# Altium PCB PCB1.PcbDoc
Units mil, origin at the board's own origin, x right, y up, seen from the top; angles counter-clockwise.
Board outline 5118.11 x 8661.42 mil, 2 copper layers (Top Layer, Bottom Layer); 13 components, 32 nets, 104 pads, 10 vias.
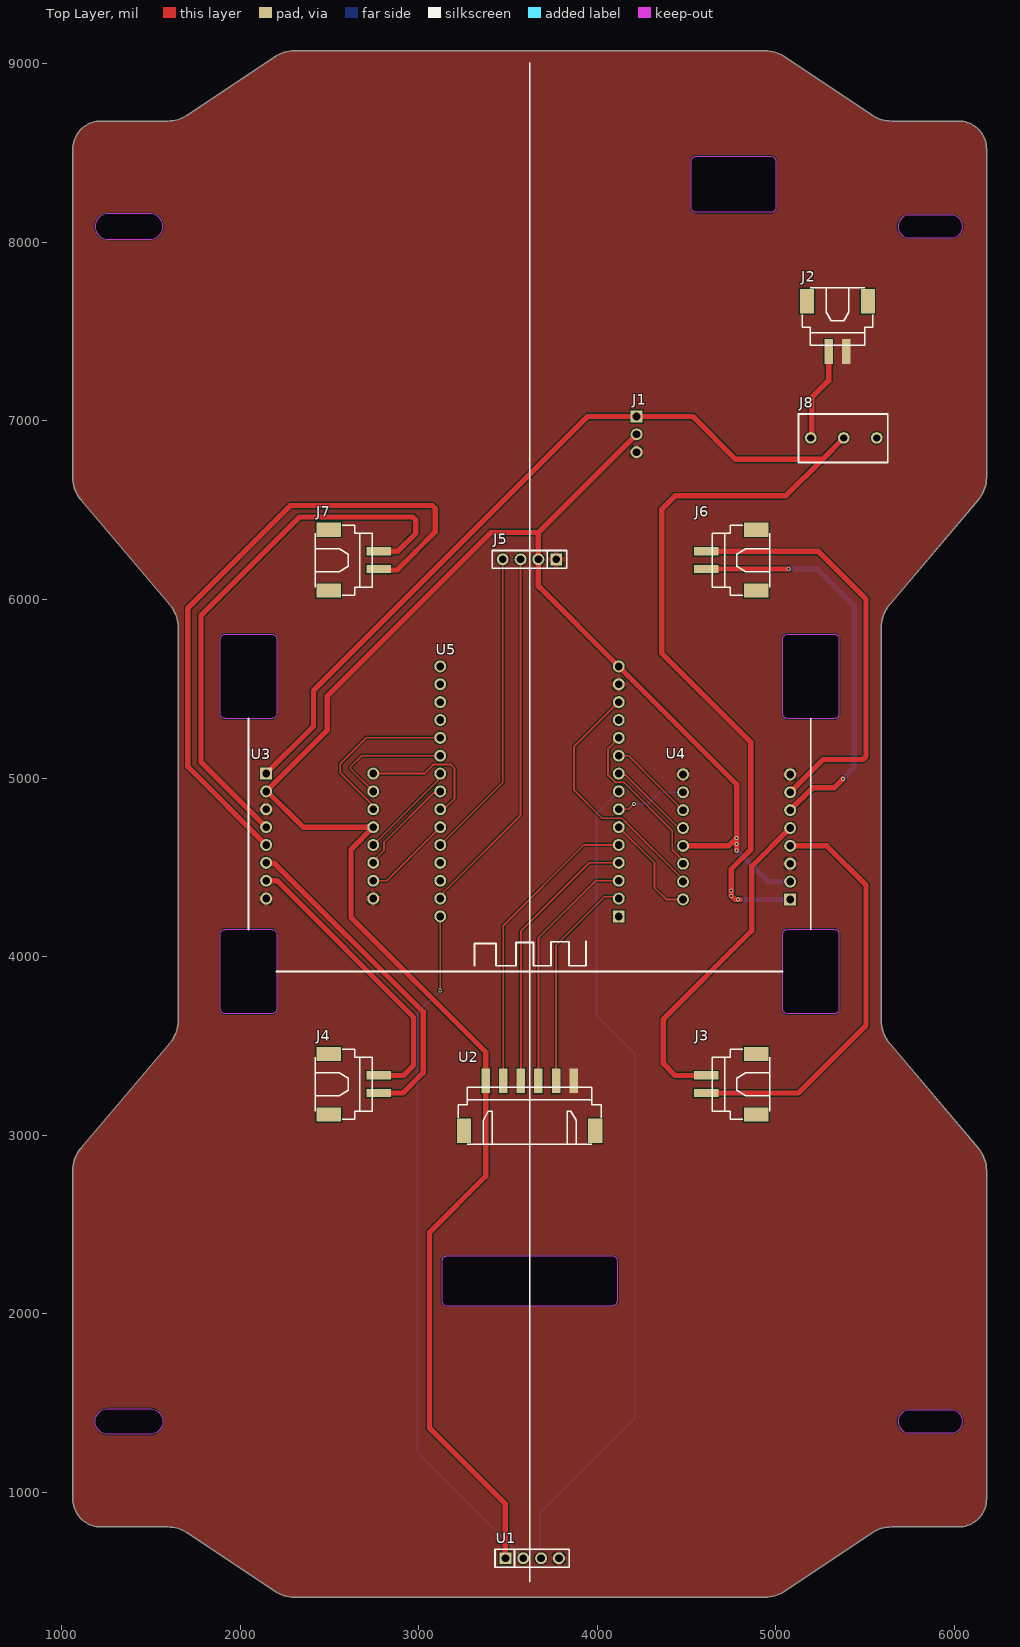
[diagram p0: Top Layer view]
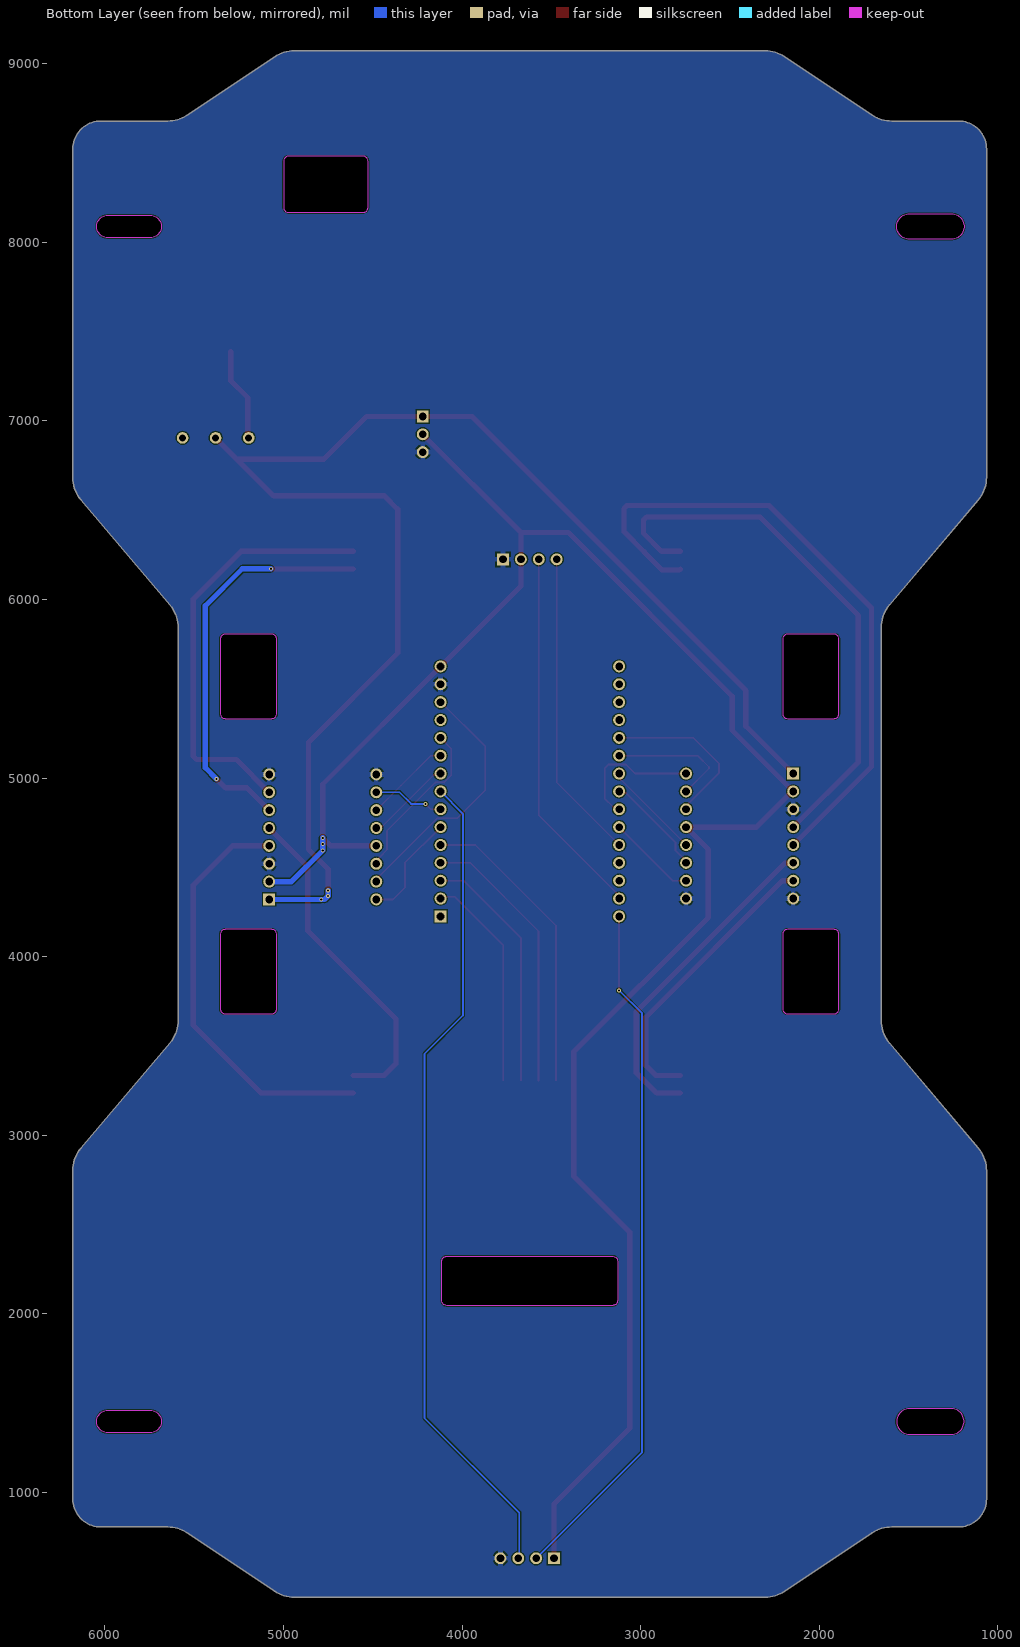
[diagram p1: Bottom Layer view, seen from below]
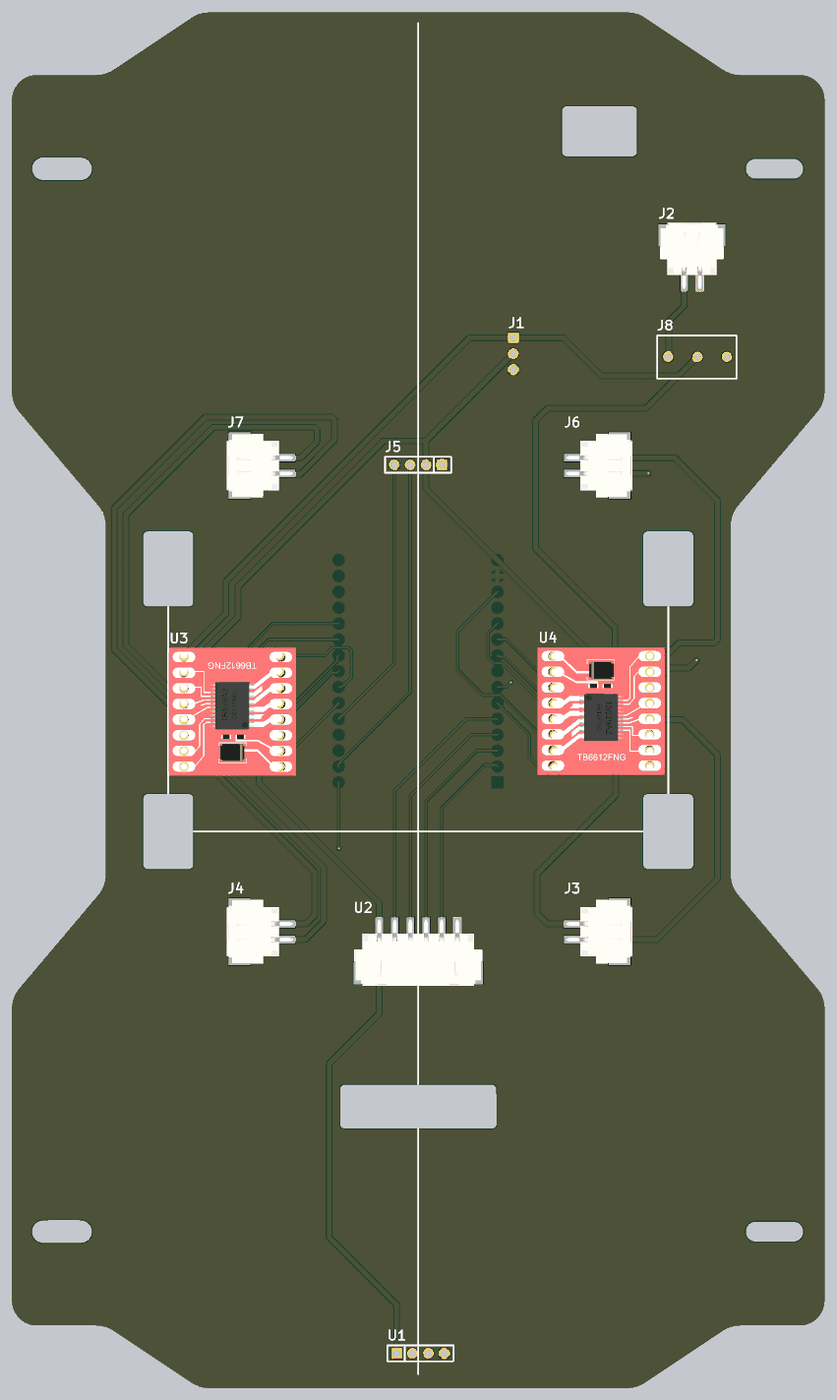
[diagram p2: 3D render of the assembled board from above, using the file's embedded part models]

## Layer stack, top to bottom
Top Solder: solder mask 0.4, Solder Resist, Dk 3.5
Top Layer: signal copper 1.4
Dielectric 1: dielectric 12.6, FR-4, Dk 4.8
Bottom Layer: signal copper 1.4
Bottom Solder: solder mask 0.4, Solder Resist, Dk 3.5

## Board outline
1062.01,962.95 ccw(c1219.49,962.95) 1219.49,805.47 1592.96,805.47 cw(c1592.96,608.62) 1702.15,772.41 2193.52,444.83 ccw(c2302.71,608.62) 2302.71,411.77 4939.42,411.77 ccw(c4939.42,608.62) 5048.61,444.83 5539.98,772.41 cw(c5649.17,608.62) 5649.17,805.47 6022.64,805.47 ccw(c6022.64,962.95) 6180.12,962.95 6180.12,2800.33 ccw(c5983.27,2800.33) 6133.59,2927.43 5636.1,3515.81 cw(c5786.42,3642.91) 5589.57,3642.91 5589.57,5842.04 cw(c5786.42,5842.04) 5636.1,5969.14 6133.59,6557.52 ccw(c5983.27,6684.62) 6180.12,6684.62 6180.12,8522 ccw(c6022.64,8522) 6022.64,8679.48 5649.17,8679.48 cw(c5649.17,8876.34) 5539.98,8712.55 5048.61,9040.12 ccw(c4939.42,8876.34) 4939.42,9073.19 2302.71,9073.19 ccw(c2302.71,8876.34) 2193.52,9040.12 1702.15,8712.55 cw(c1592.96,8876.34) 1592.96,8679.48 1219.49,8679.48 ccw(c1219.49,8522) 1062.01,8522 1062.01,6684.62 ccw(c1258.86,6684.62) 1108.54,6557.52 1606.03,5969.14 cw(c1455.71,5842.04) 1652.56,5842.04 1652.56,3642.91 cw(c1455.71,3642.91) 1606.03,3515.81 1108.54,2927.43 ccw(c1258.86,2800.33) 1062.01,2800.33
cut-out: 5747.05,8025.94 5983.27,8025.94 ccw(c5983.27,8088.93) 5983.27,8151.93 5747.05,8151.93 ccw(c5747.05,8088.93)
cut-out: 5038.39,5360.59 5038.39,5777.91 cw(c5065.95,5777.91) 5065.95,5805.47 5325.79,5805.47 cw(c5325.79,5777.91) 5353.35,5777.91 5353.35,5360.59 cw(c5325.79,5360.59) 5325.79,5333.03 5065.95,5333.03 cw(c5065.95,5360.59)
cut-out: 5038.39,3707.04 5038.39,4124.37 cw(c5065.95,4124.37) 5065.95,4151.93 5325.79,4151.93 cw(c5325.79,4124.37) 5353.35,4124.37 5353.35,3707.04 cw(c5325.79,3707.04) 5325.79,3679.48 5065.95,3679.48 cw(c5065.95,3707.04)
cut-out: 5747.05,1333.03 5983.27,1333.03 ccw(c5983.27,1396.02) 5983.27,1459.01 5747.05,1459.01 ccw(c5747.05,1396.02)
cut-out: 1258.86,1325.15 cw(c1258.86,1396.02) 1258.86,1466.89 1495.08,1466.89 cw(c1495.08,1396.02) 1495.08,1325.15
cut-out: 3128.94,2073.19 ccw(c3156.5,2073.19) 3156.5,2045.63 4085.63,2045.63 ccw(c4085.63,2073.19) 4113.19,2073.19 4113.19,2293.66 ccw(c4085.63,2293.66) 4085.63,2321.22 3156.5,2321.22 ccw(c3156.5,2293.66) 3128.94,2293.66
cut-out: 1888.78,3707.04 1888.78,4124.37 cw(c1916.34,4124.37) 1916.34,4151.93 2176.18,4151.93 cw(c2176.18,4124.37) 2203.74,4124.37 2203.74,3707.04 cw(c2176.18,3707.04) 2176.18,3679.48 1916.34,3679.48 cw(c1916.34,3707.04)
cut-out: 1888.78,5360.59 1888.78,5777.91 cw(c1916.34,5777.91) 1916.34,5805.47 2176.18,5805.47 cw(c2176.18,5777.91) 2203.74,5777.91 2203.74,5360.59 cw(c2176.18,5360.59) 2176.18,5333.03 1916.34,5333.03 cw(c1916.34,5360.59)
cut-out: 1258.86,8018.07 1495.08,8018.07 ccw(c1495.08,8088.93) 1495.08,8159.8 1258.86,8159.8 ccw(c1258.86,8088.93)
cut-out: 4526.58,8195.23 4526.58,8455.08 cw(c4554.14,8455.08) 4554.14,8482.63 4971.46,8482.63 cw(c4971.46,8455.08) 4999.02,8455.08 4999.02,8195.23 cw(c4971.46,8195.23) 4971.46,8167.67 4554.14,8167.67 cw(c4554.14,8195.23)

## Design rules (kind name [scope] priority, off if disabled: settings)
Clearance [All] p1: gap=6 ignorepadtopadclearanceinfootprint=FALSE
PolygonConnect [All] p1: thpad.connectstyle=Relief thpad.reliefconductorwidth=30 thpad.reliefentries=4 thpad.polygonreliefangle="90 Angle" thpad.airgapwidth=10 smdpad.connectstyle=Direct smdpad.reliefconductorwidth=30 smdpad.reliefentries=4 smdpad.polygonreliefangle="90 Angle" smdpad.airgapwidth=5 via.connectstyle=Direct via.reliefconductorwidth=10 via.reliefentries=4 via.polygonreliefangle="90 Angle" via.airgapwidth=10
RoutingVias [All] p1: holewidth=12 width=22 viastyle="Through Hole" minholewidth=12 minwidth=22 maxholewidth=12 maxwidth=22
SolderMaskExpansion [All] p1: expansion=4 istentingtop=FALSE
Width PWR [InNetClass('PWR')] p1: maxlimit=90 minlimit=30 preferedwidth=30
Width [All] p2: maxlimit=10 minlimit=10 preferedwidth=10
30 further rules are at their usual default settings.

## Classes and differential pairs
net class PWR: +12 GND M1A M1B M2A M2B M3A M3B M4A M4B POWER VCC

## Components (designator, comment, footprint, x,y, rotation, side; value= is the part's Value field where it differs from the comment)
J1 "稳压模块" SIP3 4220,7025 r270 top
J2 "Power12V" XH2.54-WS-2P 5345,7585 r180 top
J3 "MOTOR1" XH2.54-WS-2P 4805,3285 r90 top
J4 "MOTOR2" XH2.54-WS-2P 2580,3285 r270 top
J5 "OLED" SIP_4P-P2.54-V-F 3620,6225 r180 top
J6 "MOTOR3" XH2.54-WS-2P 4805,6220 r90 top
J7 "MOTOR4" XH2.54-WS-2P 2580,6220 r270 top
J8 "SIP3" SS-12D10 5191.96,6967 r0 top
U1 "HC-SR04" SIP_4P-P2.54-V-F 3635,630 r0 top
U2 "FollowLine" XH2.54-WS-6P 3621.06,3108.62 r0 top
U3 "TB6612FNG" TB6612FNG 1974,5253 r270 top
U4 "TB6612FNG" TB6612FNG 5251,4092 r90 top
U5 "esp32" ESP32 -16360,10189 r180 top

## Footprints (in the part's own frame and the unit in brackets; to place one, negate y for a bottom-side part, rotate by r counter-clockwise, add the part's x,y. Pads: shape width x height; smd on the part's side, far side on the other; paste and mask are expansions set on the pad)
ESP32 [mil]
  rect 66.93x66.93 hole 43.31 mask+2: 1(-20480,5964)
  round 66.93 hole 43.31 mask+2: 2(-20480,5864) 3(-20480,5764) 4(-20480,5664) 5(-20480,5564) 6(-20480,5464) 7(-20480,5364) 8(-20480,5264) 9(-20480,5164) 10(-20480,5064) 11(-20480,4964) 12(-20480,4864) 13(-20480,4764) 14(-20480,4664) 15(-20480,4564) 16(-19480,5964) 17(-19480,5864) 18(-19480,5764) 19(-19480,5664) 20(-19480,5564) 21(-19480,5464) 22(-19480,5364) 23(-19480,5264) 24(-19480,5164) 25(-19480,5064) 26(-19480,4964) 27(-19480,4864) 28(-19480,4764) 29(-19480,4664) 30(-19480,4564)
  silkscreen extent -20297,6105 -19671,6241
SIP3 [mm]
  rect 1.7x1.7 hole 1.1 mask+0.051: 1(0,0)
  round 1.7 hole 1.1 mask+0.051: 2(2.54,0) 3(5.08,0)
SIP_4P-P2.54-V-F [mm]
  rect 1.7x1.7 hole 1.1 mask+0.051: 1(-3.81,0)
  round 1.7 hole 1.1 mask+0.051: 2(-1.27,0) 3(1.27,0) 4(3.81,0)
  silkscreen extent -5.29,-1.27 5.29,1.27
SS-12D10 [mil] "3脚两档开关"
  round 65 hole 40: 1(3,-62) 2(188.04,-62) 3(373.08,-62)
  silkscreen extent -66,-200 434,72
TB6612FNG [mil]
  rect 66.93x66.93 hole 43.31 mask+2: 1(228,171)
  round 66.93 hole 43.31 mask+2: 2(328,171) 3(428,171) 4(528,171) 5(628,171) 6(728,171) 7(828,171) 8(928,171) 9(228,771) 10(328,771) 11(428,771) 12(528,771) 13(628,771) 14(728,771) 15(828,771) 16(928,771)
  body extent 179,75 986,878, height 146
XH2.54-WS-2P [mm] "长：10mm，宽：8mm，高：6.1mm"
  rect 2x3.5 smd: 0(-4.327,-2.15) 0(4.327,-2.15)
  rect 1.2x3.5 smd: 1(-1.25,4.981) 2(1.25,4.981)
  silkscreen extent -5,-4.06 5,4.06, body extent -5,-4 5,6.42, height 6.05
XH2.54-WS-6P [mm] "长：20mm，宽：8mm，高：6.1mm"
  rect 2x3.5 smd: 0(-9.327,-2.15) 0(9.327,-2.15)
  rect 1.2x3.5 smd: 1(-6.25,4.981) 2(-3.75,4.981) 3(-1.25,4.981) 4(1.25,4.981) 5(3.75,4.981) 6(6.25,4.981)
  silkscreen extent -10.16,-4.06 10.16,4.06, body extent -10,-4 10,6.42, height 6.05

## Part data
J1: library part SIP3, "jointbar"
J2 J3 J4 J6 J7: library part SIP2, "jointbar"
J5: library part SIP4, "jointbar"
J8: "jointbar"
U5: library part ESP32NodeMcu-32S

## Via types
v1: diameter 22, hole 12, Top Layer to Bottom Layer, tented both sides, 10 vias

## Nets (pads, with @x,y where several pads share a name; then routed paths per layer and width w, separated by ;. In a path a pad name is that pad's centre, name@x,y a point inside that pad or via, vN(x,y) a via of type N, cw(c..) or ccw(c..) an arc to the next point about the centre after c; other vN are vias at no path point)
+12: J1.1 J8.2 U3.1 U4.1 | length 8190
  Top Layer w30: U3.1 2410,5290 2410,5490 3945,7025 J1.1 4535,7025 4775,6785 5260,6785 ; 4800,4320 4770,4320 v1(4750,4340) v1(4750,4370) 4750,4490 4860,4600 4860,5200 4360,5700 4360,6505 4435,6580 5055,6580 5260,6785 ; J8.2 5260,6785
  Bottom Layer w30: v1(4750,4370) v1(4750,4340) 4770.12,4319.88 v1(4788.24,4319.88) 4788.36,4320 U4.1
Echo: U1.3 U5.8 | length 4657.4
  Bottom Layer w10: U1.3 3680,635 3680,885 4210,1415 4210,3455 3995,3670 3995,4800 U5.8
GND: J1.3 J2.1 J5.1 U1.4 U2.6 U3.3 U3.8 U3.16 U4.3 U4.8 U4.16 U5.14
M1A: J3.1 U4.4 | length 2354.3
  Top Layer w30: J3.1 5125.79,3235.79 5505,3615 5505,4400 5285,4620 U4.4
M1B: J3.2 U4.5 | length 1880.2
  Top Layer w30: J3.2 4435.79,3334.21 4370,3400 4370,3650 4865,4145 4865,4505 U4.5
M1IN1: U4.11 U5.11 | length 933.3
  Top Layer w10: U5.11 4060,5165 4060,5015 4096.91,4978.09 4100.44,4974.56 cw(c4125.45,4816.94) 4150.44,4974.56 4152.78,4972.22 4420,4705 4420,4597.73 4464.6,4553.14 4464.6,4550.81 4480,4535.4 U4.11
M1IN2: U4.10 U5.13 | length 1428
  Top Layer w10: U5.13 4117.93,5425 3870,5177.07 3870,4931.24 4026.1,4775.14 4138,4775.14 4160,4753.14 4480,4433.14 U4.10
M1PWM: U4.9 U5.6 | length 609.8
  Top Layer w10: U5.6 4320,4525 4320,4385 4385,4320 U4.9
M2A: J4.1 U3.7 | length 1628.9
  Top Layer w30: U3.7 2205,4425 2970,3660 2970,3390 2914.21,3334.21 J4.1
M2B: J4.2 U3.6 | length 1862.1
  Top Layer w30: U3.6 2147.98,4522.02 2192.98,4522.02 3025,3690 3025,3350 2910.79,3235.79 J4.2
M2IN1: U3.11 U5.26 | length 951.7
  Top Layer w10: U3.11 2745,4840.4 2730.73,4854.67 2730.73,4859.27 2560,5030 2560,5080 2705,5225 U5.26
M2IN2: U3.10 U5.25 | length 719.4
  Top Layer w10: U3.10 2616.64,5053.36 2616.64,5061.64 2680,5125 U5.25
M2PWM: U3.9 U5.22 | length 758.8
  Top Layer w10: U3.9 3030,5025 3080,5075 3180,5075 3200,5055 3200,4885 3154.27,4839.27 3149.67,4839.27 3135.4,4825 U5.22
M3A: J6.2 U4.7 | length 2395.9
  Top Layer w30: J6.2 5237.85,6269.21 5505,6002.06 5505,5121.3 5487.43,5103.72 5263.72,5103.72 U4.7
M3B: J6.1 U4.6 | length 2278.9
  Top Layer w30: J6.1 5069.49,6170.79 v1(5070.6,6171.9) ; U4.6 5205,4945 5325,4945 v1(5375,4995)
  Bottom Layer w30: v1(5070.6,6171.9) 5230.83,6171.9 5438.25,5964.47 5438.25,5058.25 v1(5375,4995)
M3IN1: U4.14 U5.10 | length 486.3
  Top Layer w10: U5.10 4175,5125 4342,4958 U4.14
M3IN2: U4.13 U5.9 | length 486.3
  Top Layer w10: U5.9 4128.69,5016.31 4159.85,5016.31 4456.16,4720 U4.13
M3PWM: U4.15 U5.7 | length 399.4
  Top Layer w10: U5.7 4175,4825 v1(4205,4855)
  Bottom Layer w10: v1(4205,4855) 4285,4855 4350,4920 U4.15
M4A: J7.1 U3.4 | length 3098
  Top Layer w30: U3.4 1780,5090 1780,5910 2331.79,6461.79 2965.71,6461.79 2983.28,6444.22 2983.28,6370.82 2881.67,6269.21 J7.1
M4B: J7.2 U3.5 | length 3676.8
  Top Layer w30: U3.5 1706.85,5063.15 1706.85,5951.85 2281.01,6526.01 3075.41,6526.01 3092.98,6508.43 3092.98,6380.18 2980,6267.2 2980,6266.2 2878.8,6165 2781.89,6165 J7.2
M4IN1: U3.14 U5.23 | length 572.9
  Top Layer w10: U3.14 2745,4535 2805,4595 2805,4640 3080.73,4915.73 3110.73,4915.73 U5.23
M4IN2: U3.13 U5.24 | length 555.3
  Top Layer w10: U3.13 3109.11,4989.11 3109.11,5014.11 U5.24
M4PWM: U3.15 U5.21 | length 499.3
  Top Layer w10: U3.15 2820,4425 U5.21
POWER: J2.2 J8.1 | length 525.7
  Top Layer w30: J8.1 5200,6910.04 5200,7130 5295.79,7225.79 J2.2
SCL: J5.3 U5.17 | length 2086.4
  Top Layer w10: U5.17 3120,4340.4 3135.86,4356.26 3135.86,4357.68 3570,4791.83 J5.3
SDA: J5.4 U5.20 | length 1745
  Top Layer w10: U5.20 3470,4975 J5.4
Trig: U1.2 U5.16 | length 3894
  Top Layer w10: v1(3120,3810) U5.16
  Bottom Layer w10: v1(3120,3810) 2991.56,3681.56 2991.56,1223.44 U1.2
VCC: J1.2 J5.2 U1.1 U2.1 U3.2 U3.12 U4.2 U4.12 U5.15 | length 11465.3
  Top Layer w30: U1.1 3485,935 3060,1360 3060,2455 3375,2770 U2.1 3375,3465 2620,4220 2620,4600 U3.12 2351.43,4725 2151.43,4925 U3.2 2486.34,5266.34 2486.34,5457.79 3403.55,6375 3670,6375 ; J1.2 3670,6375 ; U4.12 4735,4620 v1(4780,4665) ; v1(4780,4595) v1(4780,4630) v1(4780,4665) ; 3670,6375 J5.2 3670,6075 U5.15 4780,4965 v1(4780,4665)
  Bottom Layer w30: v1(4780,4665) v1(4780,4630) v1(4780,4595) 4955,4420 U4.2
X1: U2.2 U5.5 | length 1702.3
  Top Layer w10: U2.2 3473.43,4173.43 3925,4625 U5.5
X2: U2.3 U5.4 | length 1544
  Top Layer w10: U2.3 3571.85,4141.85 3955,4525 U5.4
X3: U2.4 U5.3 | length 1382.7
  Top Layer w10: U2.4 3670.28,4105.28 3990,4425 U5.3
X4: U2.5 U5.2 | length 1226.8
  Top Layer w10: U2.5 3768.7,4063.7 4040,4335 4110,4335 U5.2
pads on no net: J2.0 J3.0 J4.0 J6.0 J7.0 J8.3 U2.0 U5.1 U5.12 U5.18 U5.19 U5.27 U5.28 U5.29 U5.30

## Polygon pours and split planes (outlines as drawn)
GND on Top Layer "NONET_L-01_P-001" (solid, remove dead copper, pour order 1): 1062.01,962.95 ccw(c1219.49,962.95) 1219.49,805.47 1592.96,805.47 cw(c1592.96,608.62) 1702.15,772.41 2193.52,444.83 ccw(c2302.71,608.62) 2302.71,411.77 4939.42,411.77 ccw(c4939.42,608.62) 5048.61,444.83 5539.98,772.41 cw(c5649.17,608.62) 5649.17,805.47 6022.64,805.47 ccw(c6022.64,962.95) 6180.12,962.95 6180.12,2800.33 ccw(c5983.27,2800.33) 6133.59,2927.43 5636.1,3515.81 cw(c5786.42,3642.91) 5589.57,3642.91 5589.57,5842.04 cw(c5786.42,5842.04) 5636.1,5969.14 6133.59,6557.52 ccw(c5983.27,6684.62) 6180.12,6684.62 6180.12,8522 ccw(c6022.64,8522) 6022.64,8679.48 5649.17,8679.48 cw(c5649.17,8876.34) 5539.98,8712.55 5048.61,9040.12 ccw(c4939.42,8876.34) 4939.42,9073.19 2302.71,9073.19 ccw(c2302.71,8876.34) 2193.52,9040.12 1702.15,8712.55 cw(c1592.96,8876.34) 1592.96,8679.48 1219.49,8679.48 ccw(c1219.49,8522) 1062.01,8522 1062.01,6684.62 ccw(c1258.86,6684.62) 1108.54,6557.52 1606.03,5969.14 cw(c1455.71,5842.04) 1652.56,5842.04 1652.56,3642.91 cw(c1455.71,3642.91) 1606.03,3515.81 1108.54,2927.43 ccw(c1258.86,2800.33) 1062.01,2800.33
GND on Bottom Layer "NONET_L-01_P-001" (solid, remove dead copper, pour order 2): 1062.01,962.95 ccw(c1219.49,962.95) 1219.49,805.47 1592.96,805.47 cw(c1592.96,608.62) 1702.15,772.41 2193.52,444.83 ccw(c2302.71,608.62) 2302.71,411.77 4939.42,411.77 ccw(c4939.42,608.62) 5048.61,444.83 5539.98,772.41 cw(c5649.17,608.62) 5649.17,805.47 6022.64,805.47 ccw(c6022.64,962.95) 6180.12,962.95 6180.12,2800.33 ccw(c5983.27,2800.33) 6133.59,2927.43 5636.1,3515.81 cw(c5786.42,3642.91) 5589.57,3642.91 5589.57,5842.04 cw(c5786.42,5842.04) 5636.1,5969.14 6133.59,6557.52 ccw(c5983.27,6684.62) 6180.12,6684.62 6180.12,8522 ccw(c6022.64,8522) 6022.64,8679.48 5649.17,8679.48 cw(c5649.17,8876.34) 5539.98,8712.55 5048.61,9040.12 ccw(c4939.42,8876.34) 4939.42,9073.19 2302.71,9073.19 ccw(c2302.71,8876.34) 2193.52,9040.12 1702.15,8712.55 cw(c1592.96,8876.34) 1592.96,8679.48 1219.49,8679.48 ccw(c1219.49,8522) 1062.01,8522 1062.01,6684.62 ccw(c1258.86,6684.62) 1108.54,6557.52 1606.03,5969.14 cw(c1455.71,5842.04) 1652.56,5842.04 1652.56,3642.91 cw(c1455.71,3642.91) 1606.03,3515.81 1108.54,2927.43 ccw(c1258.86,2800.33) 1062.01,2800.33

## Silkscreen, mask and mechanical layers (free items; w line width, h text height)
Top Overlay:
  lines w10: 2046.26,4151.93 2046.26,5333.03 ; 2203.74,3915.71 5038.39,3915.71 ; 3621.06,498.94 3621.06,3915.71 3621.06,9006.06 ; 5195.87,4151.93 5195.87,5333.03
Mechanical 1:
  lines w10: 1062.01,962.95 ccw(c1219.49,962.95) 1219.49,805.47 1592.96,805.47 cw(c1592.96,608.62) 1702.15,772.41 2193.52,444.83 ccw(c2302.71,608.62) 2302.71,411.77 4939.42,411.77 ccw(c4939.42,608.62) 5048.61,444.83 5539.98,772.41 cw(c5649.17,608.62) 5649.17,805.47 6022.64,805.47 ccw(c6022.64,962.95) 6180.12,962.95 6180.12,2800.33 ccw(c5983.27,2800.33) 6133.59,2927.43 5636.1,3515.81 cw(c5786.42,3642.91) 5589.57,3642.91 5589.57,5842.04 cw(c5786.42,5842.04) 5636.1,5969.14 6133.59,6557.52 ccw(c5983.27,6684.62) 6180.12,6684.62 6180.12,8522 ccw(c6022.64,8522) 6022.64,8679.48 5649.17,8679.48 cw(c5649.17,8876.34) 5539.98,8712.55 5048.61,9040.12 ccw(c4939.42,8876.34) 4939.42,9073.19 2302.71,9073.19 ccw(c2302.71,8876.34) 2193.52,9040.12 1702.15,8712.55 cw(c1592.96,8876.34) 1592.96,8679.48 1219.49,8679.48 ccw(c1219.49,8522) 1062.01,8522 1062.01,6684.62 ccw(c1258.86,6684.62) 1108.54,6557.52 1606.03,5969.14 cw(c1455.71,5842.04) 1652.56,5842.04 1652.56,3642.91 cw(c1455.71,3642.91) 1606.03,3515.81 1108.54,2927.43 ccw(c1258.86,2800.33) 1062.01,2800.33 1062.01,962.95 ; 1258.86,1325.15 cw(c1258.86,1396.02) 1258.86,1466.89 1495.08,1466.89 cw(c1495.08,1396.02) 1495.08,1325.15 1258.86,1325.15 ; 1258.86,8018.07 cw(c1258.86,8088.93) 1258.86,8159.8 1495.08,8159.8 cw(c1495.08,8088.93) 1495.08,8018.07 1258.86,8018.07 ; 1888.78,3707.04 ccw(c1916.34,3707.04) 1916.34,3679.48 2176.18,3679.48 ccw(c2176.18,3707.04) 2203.74,3707.04 2203.74,4124.37 ccw(c2176.18,4124.37) 2176.18,4151.93 1916.34,4151.93 ccw(c1916.34,4124.37) 1888.78,4124.37 1888.78,3707.04 ; 1888.78,5360.59 ccw(c1916.34,5360.59) 1916.34,5333.03 2176.18,5333.03 ccw(c2176.18,5360.59) 2203.74,5360.59 2203.74,5777.91 ccw(c2176.18,5777.91) 2176.18,5805.47 1916.34,5805.47 ccw(c1916.34,5777.91) 1888.78,5777.91 1888.78,5360.59 ; 3128.94,2073.19 ccw(c3156.5,2073.19) 3156.5,2045.63 4085.63,2045.63 ccw(c4085.63,2073.19) 4113.19,2073.19 4113.19,2293.66 ccw(c4085.63,2293.66) 4085.63,2321.22 3156.5,2321.22 ccw(c3156.5,2293.66) 3128.94,2293.66 3128.94,2073.19 ; 4526.58,8195.23 ccw(c4554.14,8195.23) 4554.14,8167.67 4971.46,8167.67 ccw(c4971.46,8195.23) 4999.02,8195.23 4999.02,8455.08 ccw(c4971.46,8455.08) 4971.46,8482.63 4554.14,8482.63 ccw(c4554.14,8455.08) 4526.58,8455.08 4526.58,8195.23 ; 5038.39,3707.04 ccw(c5065.95,3707.04) 5065.95,3679.48 5325.79,3679.48 ccw(c5325.79,3707.04) 5353.35,3707.04 5353.35,4124.37 ccw(c5325.79,4124.37) 5325.79,4151.93 5065.95,4151.93 ccw(c5065.95,4124.37) 5038.39,4124.37 5038.39,3707.04 ; 5038.39,5360.59 ccw(c5065.95,5360.59) 5065.95,5333.03 5325.79,5333.03 ccw(c5325.79,5360.59) 5353.35,5360.59 5353.35,5777.91 ccw(c5325.79,5777.91) 5325.79,5805.47 5065.95,5805.47 ccw(c5065.95,5777.91) 5038.39,5777.91 5038.39,5360.59 ; 5747.05,1333.03 cw(c5747.05,1396.02) 5747.05,1459.01 5983.27,1459.01 cw(c5983.27,1396.02) 5983.27,1333.03 5747.05,1333.03 ; 5747.05,8025.94 cw(c5747.05,8088.93) 5747.05,8151.93 5983.27,8151.93 cw(c5983.27,8088.93) 5983.27,8025.94 5747.05,8025.94